# EAGLE board GB-BRK-M (EAGLE 7.5.0)
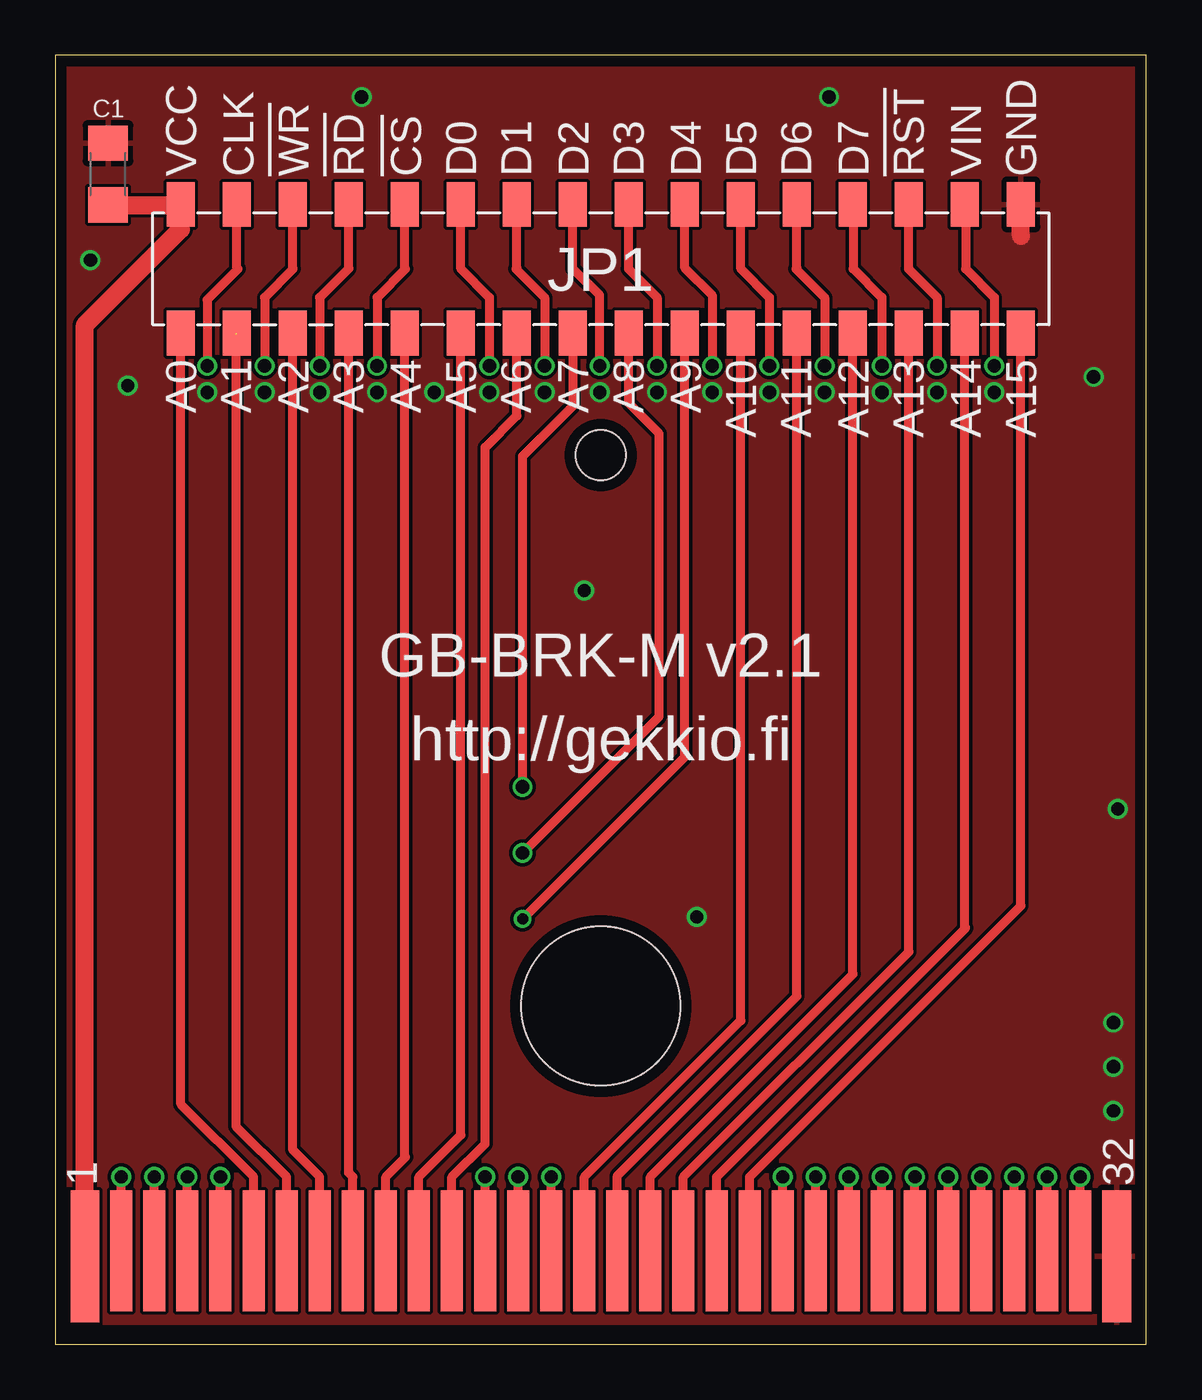
[diagram p0: board, top side]
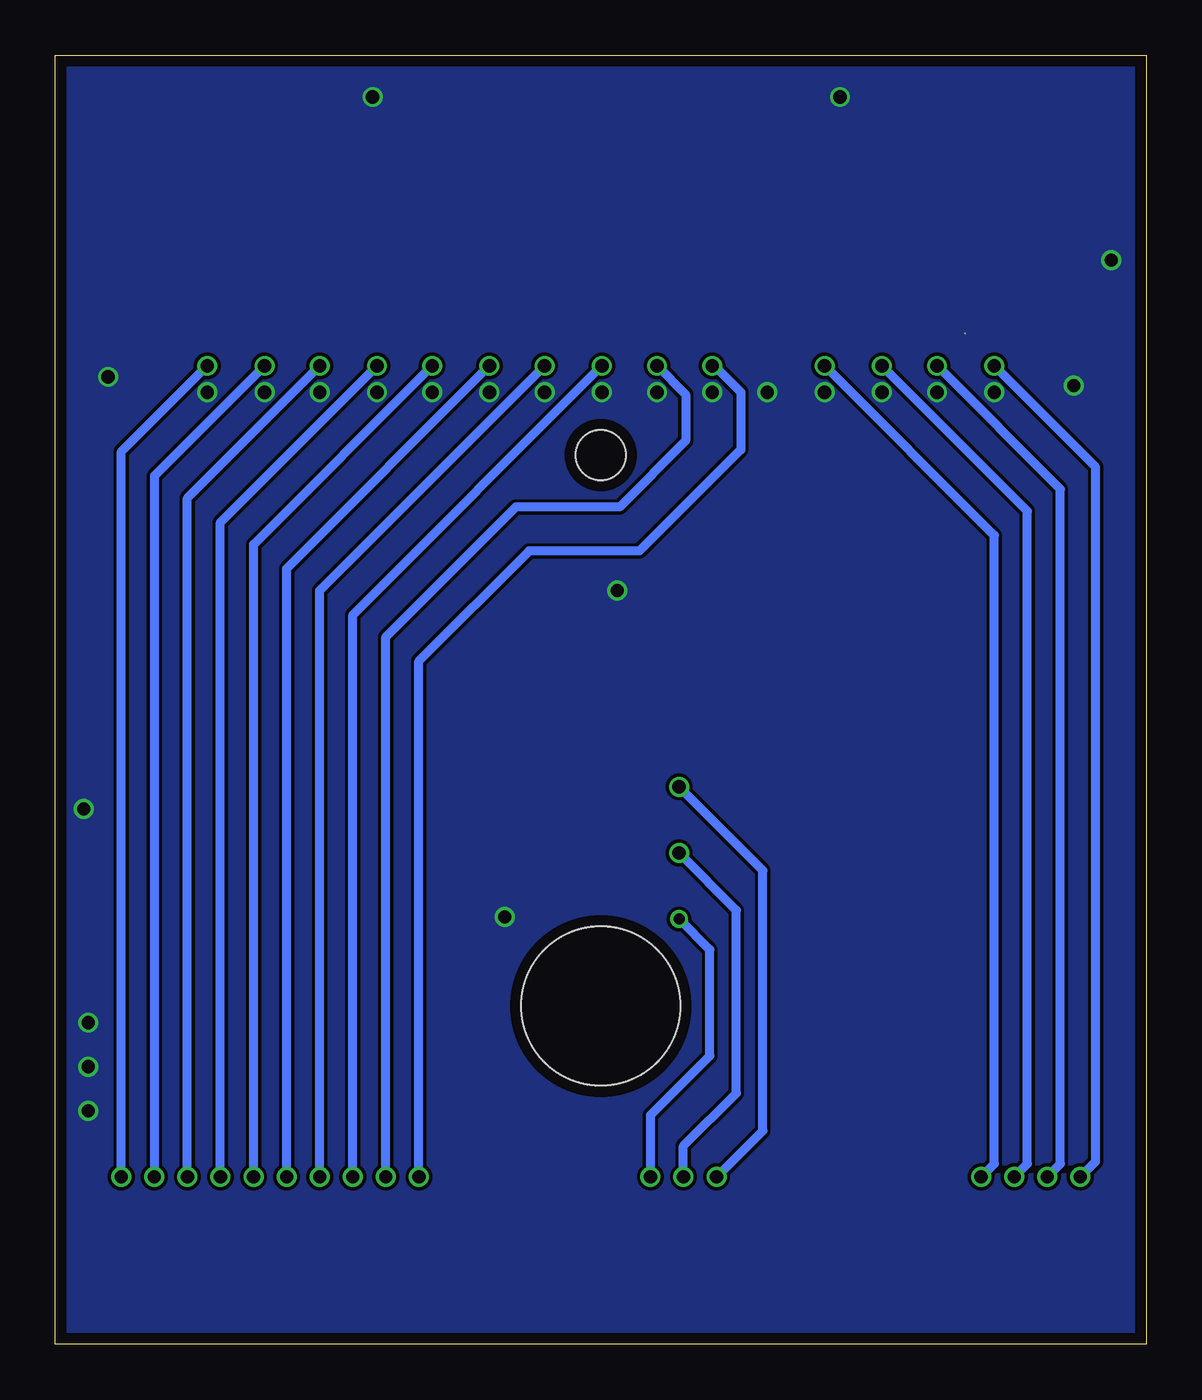
[diagram p1: board, bottom side, seen from below]

Size 49.5 x 58.5 mm. Coordinates in mm from the lower left corner, seen from the top.
Outline: 0,0 49.5,0 49.5,58.5 0,58.5 0,0
Copper layers (1*16): Top 0.035mm / dielectric 1.6mm / Bottom 0.035mm
Design rules "Elecrow_2-layer_PCB_eagle_rule *": minimum track width 6mil, minimum drill 12mil, track to track 6mil, track to pad 6mil, pad to pad 6mil, via to via 8mil, smd to smd 0mil, copper to edge 20mil, drill to drill 10mil, minimum pad ring 6mil, minimum via ring 6mil, stop-mask expansion 0mil, vias tented up to drill 100mil, thermal gap 10mil
Net classes: 0 default: width 0.381 mm; 1 power: width 0.762 mm
Holes 7.2 mm at 24.75,15.35
Holes 2.25 mm at 24.75,40.35

## Footprints (pad centres in the part's own frame; a part is rotated, then mirrored left to right if it is on the bottom)
1206 = smd 1.6 x 1.8: 1 -1.4,0; 2 1.4,0
2X16_SMT = smd 1.27 x 2.032: 1 -19.05,-2.921; 2 -19.05,2.921; 3 -16.51,-2.921; 4 -16.51,2.921; 5 -13.97,-2.921; 6 -13.97,2.921; 7 -11.43,-2.921; 8 -11.43,2.921; 9 -8.89,-2.921; 10 -8.89,2.921; 11 -6.35,-2.921; 12 -6.35,2.921; 13 -3.81,-2.921; 14 -3.81,2.921; 15 -1.27,-2.921; 16 -1.27,2.921; 17 1.27,-2.921; 18 1.27,2.921; 19 3.81,-2.921; 20 3.81,2.921; 21 6.35,-2.921; 22 6.35,2.921; 23 8.89,-2.921; 24 8.89,2.921; 25 11.43,-2.921; 26 11.43,2.921; 27 13.97,-2.921; 28 13.97,2.921; 29 16.51,-2.921; 30 16.51,2.921; 31 19.05,-2.921; 32 19.05,2.921
GB-CART-M = smd 6 x 1.3: 1 0,22.65; 32 0,-24.15 | smd 5.5 x 1: 2 0.25,21; 3 0.25,19.5; 4 0.25,18; 5 0.25,16.5; 6 0.25,15; 7 0.25,13.5; 8 0.25,12; 9 0.25,10.5; 10 0.25,9; 11 0.25,7.5; 12 0.25,6; 13 0.25,4.5; 14 0.25,3; 15 0.25,1.5; 16 0.25,0; 17 0.25,-1.5; 18 0.25,-3; 19 0.25,-4.5; 20 0.25,-6; 21 0.25,-7.5; 22 0.25,-9; 23 0.25,-10.5; 24 0.25,-12; 25 0.25,-13.5; 26 0.25,-15; 27 0.25,-16.5; 28 0.25,-18; 29 0.25,-19.5; 30 0.25,-21; 31 0.25,-22.5

## Placement (x,y rotation side)
C1  0.1uF  [1206]  2.4,53.1 90 top
JP1  [2X16_SMT]  24.75,48.8 0 top
U$2  GB-CART-M  [GB-CART-M]  24,4 90 top

## Library data of the parts
C1 = SparkFun-Capacitors
JP1 = pinhead+
U$2 = Gameboy

## Nets
!CS: JP1.10 U$2.5
!RD: JP1.8 U$2.4
!RST: JP1.28 U$2.30
!WR: JP1.6 U$2.3
A0: JP1.1 U$2.6
A1: JP1.3 U$2.7
A2: JP1.5 U$2.8
A3: JP1.7 U$2.9
A4: JP1.9 U$2.10
A5: JP1.11 U$2.11
A6: JP1.13 U$2.12
A7: JP1.15 U$2.13
A8: JP1.17 U$2.14
A9: JP1.19 U$2.15
A10: JP1.21 U$2.16
A11: JP1.23 U$2.17
A12: JP1.25 U$2.18
A13: JP1.27 U$2.19
A14: JP1.29 U$2.20
A15: JP1.31 U$2.21
CLK: JP1.4 U$2.2
D0: JP1.12 U$2.22
D1: JP1.14 U$2.23
D2: JP1.16 U$2.24
D3: JP1.18 U$2.25
D4: JP1.20 U$2.26
D5: JP1.22 U$2.27
D6: JP1.24 U$2.28
D7: JP1.26 U$2.29
GND [ground]: C1.2 JP1.32 U$2.32
VCC [power]: C1.1 JP1.2 U$2.1
VIN: JP1.30 U$2.31

## Tracks (layer width: path | path; a pad name or v marks a point on that pad's centre or on a via)
!CS  (via drill 0.6)
  Top 0.406: U$2.5 v7.5,7.6 | JP1.10 15.86,48.84 15.9,48.8 14.6,47.5 v14.6,44.4
  Bottom 0.406: v7.5,7.6 6.9,8.2 6.9,36.7 v14.6,44.4
!RD  (via drill 0.6)
  Top 0.406: U$2.4 v6,7.6 | JP1.8 13.32,48.82 12,47.5 v12,44.4
  Bottom 0.406: v6,7.6 5.4,8.2 5.4,37.8 v12,44.4
!RST  (via drill 0.6)
  Top 0.406: U$2.30 v45,7.6 | JP1.28 38.72,48.82 38.7,48.8 40,47.5 v40,44.4
  Bottom 0.406: v40,44.4 45,39.4 v45,7.6
!WR  (via drill 0.6)
  Top 0.406: U$2.3 v4.5,7.6 | JP1.6 10.78,48.82 10.8,48.8 9.5,47.5 v9.5,44.4
  Bottom 0.406: v4.5,7.6 3.9,8.2 3.9,38.8 v9.5,44.4
A0
  Top 0.406: U$2.6 9,7.6 5.7,10.9 JP1.1
A1  (1 unrouted)
  Top 0.406: 8.2,45.84 8.2,9.9 10.5,7.6 U$2.7
A2
  Top 0.406: U$2.8 12,7.6 10.78,8.82 JP1.5
A3
  Top 0.406: U$2.9 13.5,7.6 13.3,7.8 13.32,7.82 JP1.7
A4
  Top 0.406: U$2.10 15,7.6 15.9,8.5 15.86,8.54 JP1.9
A5
  Top 0.406: U$2.11 16.5,7.6 18.4,9.5 JP1.11
A6
  Top 0.406: U$2.12 18,7.6 19.5,9.1 19.5,40.7 20.94,42.14 JP1.13
A7  (via drill 0.6)
  Top 0.406: U$2.13 v19.5,7.6 | JP1.15 23.48,42.58 21.2,40.3 v21.2,25.3
  Bottom 0.406: v19.5,7.6 17.4,9.7 17.4,21.5 v21.2,25.3
A8  (via drill 0.6)
  Top 0.406: U$2.14 v21,7.6 | JP1.17 26.02,42.7 27.4,41.32 27.4,28.5 v21.2,22.3
  Bottom 0.406: v21,7.6 21,9 18.6,11.4 18.6,19.7 v21.2,22.3
A9  (via drill 0.5, 0.6)
  Top 0.406: U$2.15 v22.5,7.6 | v21.2,19.3 28.56,26.66 JP1.19
  Bottom 0.406: v22.5,7.6 22.5,10.4 19.8,13.1 19.8,17.9 v21.2,19.3
A10
  Top 0.406: U$2.16 24,7.6 31.1,14.7 JP1.21
A11
  Top 0.406: U$2.17 25.5,7.66 33.64,15.8 JP1.23
A12
  Top 0.406: U$2.18 27,7.6 36.2,16.8 36.18,16.82 JP1.25
A13
  Top 0.406: U$2.19 28.5,7.6 38.72,17.82 JP1.27
A14
  Top 0.406: U$2.20 30,7.6 41.3,18.9 41.26,18.94 JP1.29
A15
  Top 0.406: U$2.21 31.5,7.6 43.8,19.9 JP1.31
CLK  (via drill 0.6)
  Top 0.406: U$2.2 v3,7.6 | JP1.4 8.24,48.86 8.3,48.8 6.9,47.4 v6.9,44.4
  Bottom 0.406: v3,7.6 2.3,8.3 2.3,39.8 v6.9,44.4
D0  (via drill 0.6)
  Top 0.406: U$2.22 v33,7.6 | JP1.12 18.4,48.8 19.7,47.5 v19.7,44.4
  Bottom 0.406: v33,7.6 33,31 28,36 23,36 18.4,40.6 18.4,43.2 19.6,44.4 v19.7,44.4
D1  (via drill 0.6)
  Top 0.406: U$2.23 v34.5,7.6 | JP1.14 20.94,48.84 20.9,48.8 22.2,47.5 v22.2,44.4
  Bottom 0.406: v34.5,7.6 34.5,32.1 28.6,38 23.9,38 20.9,41 20.9,43.1 v22.2,44.4
D2  (via drill 0.6)
  Top 0.406: U$2.24 v36,7.6 | JP1.16 23.48,48.82 24.7,47.6 v24.7,44.4
  Bottom 0.406: v36,7.6 36,33.1 v24.7,44.4
D3  (via drill 0.6)
  Top 0.406: U$2.25 v37.5,7.6 | JP1.18 26.02,48.82 26,48.8 27.3,47.5 v27.3,44.4
  Bottom 0.406: v27.3,44.4 37.5,34.2 v37.5,7.6
D4  (via drill 0.6)
  Top 0.406: U$2.26 v39,7.6 | JP1.20 28.56,48.84 29.8,47.6 v29.8,44.4
  Bottom 0.406: v29.8,44.4 39,35.2 v39,7.6
D5  (via drill 0.6)
  Top 0.406: U$2.27 v40.5,7.6 | JP1.22 31.1,48.8 32.4,47.5 v32.4,44.4
  Bottom 0.406: v32.4,44.4 40.5,36.3 v40.5,7.6
D6  (via drill 0.6)
  Top 0.406: U$2.28 v42,7.6 | JP1.24 33.64,48.84 33.6,48.8 34.9,47.5 v34.9,44.4
  Bottom 0.406: v34.9,44.4 42,37.3 v42,7.6
D7  (via drill 0.6)
  Top 0.406: U$2.29 v43.5,7.6 | JP1.26 36.2,51.7 36.2,48.8 37.5,47.5 v37.5,44.4
  Bottom 0.406: v37.5,44.4 43.5,38.4 v43.5,7.6
GND  (via drill 0.6)
  Top 0.813: 43.8,50.3 JP1.32
  other vias: 42.6,43.2 40,43.2 37.5,43.2 34.9,43.2 32.4,43.2 29.8,43.2 27.3,43.2 24.7,43.2 22.2,43.2 19.7,43.2 14.6,43.2 12,43.2 17.2,43.2 9.5,43.2 6.9,43.2 48,10.6 48.2,24.3 47.1,43.9 1.6,49.2 3.3,43.5 29.1,19.4 24,34.2 13.9,56.6 35.1,56.6 48,12.6 48,14.6
  pour Bottom: 0,58.5 0,0 49.5,0 49.5,58.5
  pour Top: 0,58.5 0,1 49.5,1 49.5,58.5
VCC
  Top 0.813: C1.1 5.68,51.7 JP1.2 5.7,50.6 1.35,46.25 U$2.1
VIN  (via drill 0.6)
  Top 0.406: U$2.31 v46.5,7.6 | JP1.30 41.3,51.68 41.3,48.8 42.6,47.5 v42.6,44.4
  Bottom 0.406: v42.6,44.4 46.5,40.5 v46.5,7.6

## Text on the board
tPlace: VCC | CLK | !WR | !RD | !CS | D0 | D1 | D2 | D3 | D4 | D5 | D6 | D7 | !RST | VIN | GND | A0 | A1 | A2 | A3 | A4 | A5 | A6 | A7 | A8 | A9 | A10 | A11 | A12 | A13 | A14 | A15 | GB-BRK-M v2.1 | http://gekkio.fi | 1 | 32